# Altium PCB MaryLadder_8bits.PcbDoc (part 2 of 2)
Units mil, origin at the board's own origin, x right, y up, seen from the top; angles counter-clockwise.
Board outline 2465.9 x 2730.18 mil, 4 copper layers (Top Layer, Layer 1, Layer 2, Bottom Layer), stack 61.461 mil thick; 110 components, 105 nets, 478 pads, 183 vias.
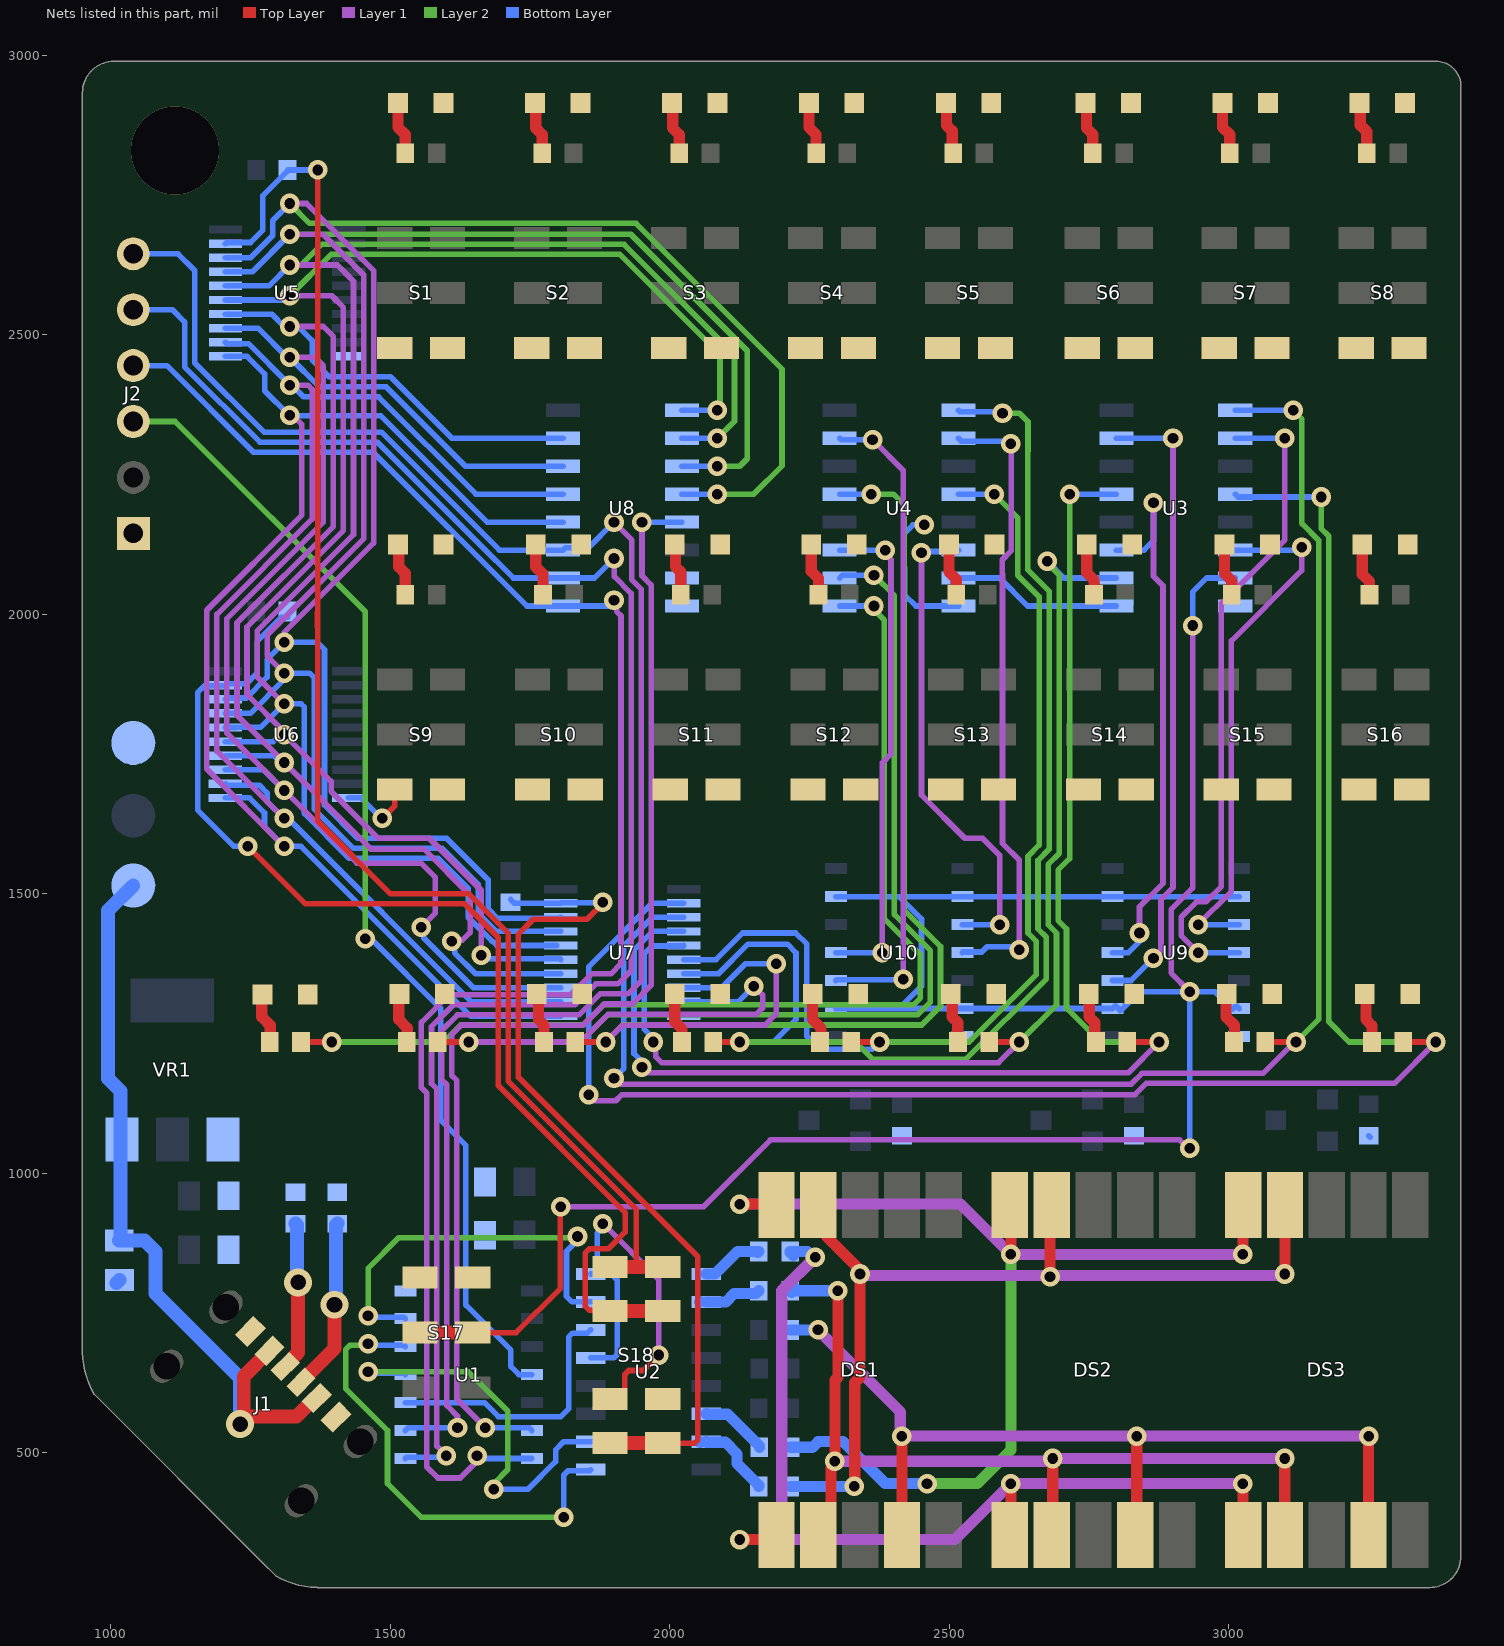
[diagram p4: the nets of this part, all layers, seen from the top]

## Via types
v1: diameter 35, hole 19, Top Layer to Bottom Layer, 179 vias
v2: diameter 50, hole 28, Top Layer to Bottom Layer, 3 vias
v3: diameter 157.48, hole 157.48, Top Layer to Bottom Layer, 1 vias

## Nets (pads, with @x,y where several pads share a name; then routed paths per layer and width w, separated by ;. In a path a pad name is that pad's centre, name@x,y a point inside that pad or via, vN(x,y) a via of type N, cw(c..) or ccw(c..) an arc to the next point about the centre after c; other vN are vias at no path point) (continued)
DS_C_R: DS1.4 DS2.4 DS3.4 R28.2 | length 1669.2
  Top Layer w20: v1(2415,530) 2415,353.25 DS1.4@2415.2,353.06 ; DS2.4@2832.5,353.06 2835,355.56 v1(2835,530) ; DS3.4@3249.8,353.06 3249.8,529.8 v1(3250,530)
  Layer 1 w20: v1(2265,720) 2412.13,572.87 2412.13,532.87 v1(2415,530) v1(2835,530) v1(3250,530)
  Bottom Layer w20: R28.2@2215,720 v1(2265,720)
DS_D: R29.1 U2.10 | length 103.5
  Bottom Layer w20: U2.10@2053.35,770 U2.10@2054.17,770.83 ; U2.10@2065,770 2100,770 2115,785 2154,785 R29.1@2159,790
DS_D_R: DS1.2 DS2.2 DS3.2 R29.2 | length 1641
  Top Layer w20: DS1.2@2265.59,353.06 2288.07,375.54 2288.07,474.01 2295.5,481.44 2295.5,630.3 2300.5,635.3 2300.5,789.5 v1(2300,790) ; DS2.2@2682.89,353.06 2685,355.16 v1(2685,490) ; DS2.2@2685.2,353.06 DS2.2@2692.5,360.36 ; v1(3100,490) 3100,353.25 DS3.2@3100.2,353.06
  Layer 1 w20: v1(2295,485) 2680,485 v1(2685,490) v1(3100,490)
  Bottom Layer w20: R29.2@2220.75,797.72 2215,791.97 R29.2@2215,790 2217.5,787.5 2220,790 v1(2300,790)
DS_E: R30.1 U2.9 | length 113
  Bottom Layer w20: U2.9@2065,820 2080.75,820 2120.75,860 R30.1@2159,860 R30.1@2157.25,858.25
DS_E_R: DS1.1 DS2.1 DS3.1 R30.2 | length 1830.2
  Top Layer w20: v1(2125,345) 2183.45,345 2188.45,350 2190.39,348.06 DS1.1@2212.72,370.38 ; DS2.1@2608.09,353.06 2610,354.96 v1(2610,445) ; DS2.1@2610.39,353.06 DS2.1@2621.41,364.07 ; v1(3025,445) 3025,353.45 DS3.1@3025.39,353.06
  Layer 1 w20: v1(2125,345) 2200,345 ; v1(2260,850) 2200,790 2200,345 ; v1(3025,445) v1(2610,445) 2510,345 2200,345
  Bottom Layer w20: R30.2@2220.75,852.87 2215,858.62 R30.2@2215,860 2245.94,860 2255.94,850 v1(2260,850)
DS_F: R31.1 U2.15 | length 139.6
  Bottom Layer w20: U2.15@2053.35,520 U2.15@2054.17,519.17 ; U2.15@2065,520 2065.83,519.17 2099.11,519.17 2120,498.28 2120,480.97 2159,441.97 R31.1@2159,440
DS_F_R: DS1.9 DS2.9 DS3.9 R31.2 | length 1671.2
  Top Layer w20: DS1.9@2265.59,943.61 2280,929.2 2280,887.01 2340,827.01 v1(2340,820) 2340,635 2330.5,625.5 2330.5,440.5 v1(2330,440) ; v1(2680,815) 2680,940.71 DS2.9@2682.89,943.61 ; v1(3100,820) 3100.2,820.2 DS3.9@3100.2,943.61
  Layer 1 w20: v1(2340,820) 2342.5,817.5 2677.5,817.5 v1(2680,815) 2682.5,817.5 3097.5,817.5 v1(3100,820)
  Bottom Layer w20: R31.2@2215,440 v1(2330,440)
DS_G: R32.1 U2.14 | length 121
  Bottom Layer w20: U2.14@2065,570 2065.83,569.17 2102.8,569.17 2160,511.97 R32.1@2160,510
DS_G_R: DS1.10 DS2.10 DS3.10 R32.2 | length 1993.4
  Top Layer w20: v1(2125,945) 2172.18,945 2182.18,935 DS1.10@2190.79,943.61 ; DS2.10@2608.09,943.61 2610,941.7 v1(2610,855) ; v1(3025,855) 3025,943.21 DS3.10@3025.39,943.61
  Layer 1 w20: v1(2125,945) 2520,945 v1(2610,855) v1(3025,855)
  Layer 2 w20: v1(2460,445) 2550,445 2610,505 v1(2610,855)
  Bottom Layer w20: R32.2@2216,510 2255,510 2265.5,520.5 2309.7,520.5 2385.2,445 v1(2460,445)
GND: C1.1 C2.1 C3.1 C4.1 C5.1 D1.2 D2.2 D3.2 D4.2 D5.2 D6.2 D7.2 D8.2 D9.2 D10.2 D11.2 D12.2 D13.2 D14.2 D15.2 D16.2 D17.2 D18.2 D19.2 D20.2 D21.2 D22.2 D23.2 D24.2 D25.2 GND.1 J1.A12 J1.B12 J2.1 R36.1 R37.1 R38.1 RCC1.2 RCC2.2 S1.3 S1.6 S2.3 S2.6 S3.3 S3.6 S4.3 S4.6 S5.3 S5.6 S6.3 S6.6 S7.3 S7.6 S8.3 S8.6 S9.3 S9.6 S10.3 S10.6 S11.3 S11.6 S12.3 S12.6 S13.3 S13.6 S14.3 S14.6 S15.3 S15.6 S16.3 S16.6 S17.1 S17.4 S18.3 S18.7 U1.14 U2.5 U2.8 U3.8 U4.8 U5.10 U6.10 U7.10 U8.7 U8.8 U9.7 U10.7 VR1.1 | length 1217.3
  Top Layer w10: v1(1485.5,1635) 1507.76,1657.26 S9.3@1507.76,1686.57 ; D9.2@1594.86,2125 D9.2@1595,2125.14 ; D1.2@1594.86,2915 D1.2@1595,2915.14 ; S10.3@1754.18,1686.57 S10.3@1754.81,1686.57 ; D2.2@1839.86,2915 D2.2@1840,2915.14 ; S18.3@1892.76,596.26 1904.57,596.26 1919.25,610.94 1919.25,640.29 1926.32,647.36 1952.36,647.36 v1(1980,675) ; S11.3@2000,1685.96 S11.3@2000.61,1686.57 ; D3.2@2084.86,2915 D3.2@2085,2915.14 ; D11.2@2089.95,2125 D11.2@2089.95,2125 ; S3.6@2092.24,2476.57 S3.6@2095,2473.82 ; D4.2@2329.86,2915 D4.2@2330,2915.14 ; D12.2@2334.15,2125 D12.2@2335,2125.85 ; D21.2@2336.83,1320.91 D21.2@2340.73,1317 ; S13.3@2493.47,1686.57 S13.3@2495,1685.04 ; D5.2@2574.86,2915 D5.2@2575,2915.14 ; D13.2@2580.58,2125 D13.2@2585,2129.42 ; D6.2@2824.86,2915 D6.2@2825,2915.14 ; D23.2@2825,1326.48 D23.2@2830.58,1320.91 D23.2@2843.29,1333.62 ; D14.2@2827,2125 D14.2@2830,2128 ; D7.2@3069.86,2915 D7.2@3070,2915.14 ; D15.2@3070,2128.43 D15.2@3073.43,2125 ; S8.3@3227.76,2476.57 S8.3@3229.81,2476.57 ; D16.2@3319.86,2125 D16.2@3320,2125.14 ; D25.2@3324.33,1320.91 D25.2@3327.24,1323.82
  Top Layer w25: J1.A12@1398.01,563.97 J1.A12@1402.61,563.97
  Layer 1 w10: v1(1880,910) 1980,810 v1(1980,675)
  Bottom Layer w10: U6.10@1425.04,1671.61 1447.48,1671.61 1484.09,1635 v1(1485.5,1635) ; U2.5@1858.31,670 1899.88,670 1905.74,675.86 1905.74,809.26 1895,820 U2.8@1864.17,820 ; U2.8@1858.31,820 U2.8@1864.17,820 ; v1(1880,910) 1880,903.24 1870,893.24 1870,825.83 U2.8@1864.17,820 ; v1(2455,2160) 2434.5,2160 2419.5,2145 2419.5,2084.07 2420,2083.57 2420,2035 2440,2015 U4.8@2516.3,2015 ; R38.1@3250,1067.44 R38.1@3252.44,1065
  Bottom Layer w25: C1.1@1010,804.13 C1.1@1015.39,809.53
  other v3: 1115,2830
IN_DS_A: U1.13 U2.7 | length 714.8
  Layer 2 w10: v1(1460,745) 1460,830 1515,885 1832.58,885 v1(1834.64,887.07)
  Bottom Layer w10: v1(1460,745) 1462.5,742.5 1524.31,742.5 U1.13@1526.81,740 ; v1(1834.64,887.07) 1834.64,880.3 1815,860.66 1815,780 1825,770 U2.7@1858.31,770
IN_DS_B: U1.12 U2.1 | length 851.4
  Layer 2 w10: v1(1460,695) 1457.5,692.5 1427.5,692.5 1420,685 1420,615 1494.75,540.25 1494.75,445.25 1555,385 v1(1810,385)
  Bottom Layer w10: v1(1460,695) 1462.5,692.5 1524.31,692.5 U1.12@1526.81,690 ; v1(1810,385) 1810,460 1817.98,467.98 1856.29,467.98 U2.1@1858.31,470
IN_DS_C: U1.11 U2.2 | length 719.1
  Layer 2 w10: v1(1460,645) 1640,645 1710,575 1710,470 1685,445 v1(1685,435)
  Bottom Layer w10: v1(1460,645) 1462.5,642.5 1524.31,642.5 U1.11@1526.81,640 ; v1(1685,435) 1746.1,435 1795.44,484.34 1795.44,505.44 1810,520 U2.2@1858.31,520
IN_DS_D: U1.10 U2.6 | length 481.2
  Bottom Layer w10: U1.10@1526.81,590 1668.13,590 1693.13,565 1805,565 1818.73,578.73 1818.73,707.05 1825.86,714.17 1852.48,714.17 U2.6@1858.31,720
K: S17.2 S17.5 U3.7 U9.2 U9.6 U9.9 U9.13 U10.2 U10.6 U10.9 U10.13 | length 4436.9
  Top Layer w10: S17.5@1647.24,715 1725,715 1804.14,794.14 1804.14,939.14 v1(1805,940)
  Top Layer w25: S17.2@1552.76,715 S17.5@1647.24,715
  Layer 1 w10: v1(1805,940) 1866.87,940 1867.37,940.5 2060.5,940.5 2180,1060 2911.64,1060 2926.64,1045 v1(2930,1045) ; v1(2930,1325) 2896.5,1358.5 2896.5,1471.96 2935,1510.46 v1(2935,1980)
  Bottom Layer w10: U10.9@2296.81,1295 2410,1295 ; U10.13@2296.81,1495 2410,1495 ; v1(2930,1045) v1(2930,1325) ; v1(2935,1980) 2935,2040 2960,2065 U3.7@3011.3,2065 ; U9.6@3018.19,1295 3013.19,1300 3006.59,1293.41 2975,1325 v1(2930,1325) ; U9.2@3018.19,1495 U9.13@2791.81,1495 2791.31,1494.5 2523.69,1494.5 U10.2@2523.19,1495 2410,1495 ; 2410,1295 2450,1335 2450,1455 2410,1495 ; 2410,1295 U10.6@2523.19,1295 U9.9@2791.81,1295 2796.81,1300 2805.91,1290.91 2840,1325 v1(2930,1325)
M0: U5.18 U6.18 U7.18 U8.4 | length 3537.7
  Layer 1 w10: v1(1310,1950) 1310,1967.68 1470,2127.68 1470,2615 1350,2735 v1(1320,2735)
  Layer 2 w10: v1(1320,2735) 1355.5,2699.5 1939.64,2699.5 2200.5,2438.64 2200.5,2265.5 2150,2215 v1(2085,2215)
  Bottom Layer w10: U6.18@1204.96,1847.99 1207.44,1850.47 1242.34,1850.47 1279.5,1887.63 1279.5,1919.5 v1(1310,1950) 1369.14,1950 1382.12,1937.02 1382.12,1658.75 1441.37,1599.5 1600.5,1599.5 1675,1525 1675,1473.15 1691.9,1456.25 1803.22,1456.25 U7.18@1804.96,1457.99 ; U5.18@1205,2637.99 1249.47,2637.99 1289.5,2678.02 1289.5,2704.5 v1(1320,2735) ; U8.4@2021.3,2215 v1(2085,2215)
M1: U5.17 U6.17 U7.17 U8.3 | length 3318
  Layer 1 w10: v1(1310,1895) 1279.5,1925.5 1279.5,1962.63 1452,2135.13 1452,2607.54 1379.54,2680 v1(1320,2680)
  Layer 2 w10: v1(1320,2680) 1930,2680 2138.43,2471.57 2138.43,2278.43 2125,2265 v1(2085,2265)
  Bottom Layer w10: U6.17@1204.96,1822.8 1249.43,1822.8 1310,1883.36 v1(1310,1895) 1355,1895 1364.12,1885.88 1364.12,1651.29 1433.91,1581.5 1593.04,1581.5 1657,1517.54 1657,1465.69 1689.9,1432.8 U7.17@1804.96,1432.8 ; U5.17@1205,2612.8 1252.8,2612.8 v1(1320,2680) ; U8.3@2021.3,2265 v1(2085,2265)
M2: U5.16 U6.16 U7.16 U8.2 | length 3153.7
  Layer 1 w10: v1(1310,1840) 1261.5,1888.5 1261.5,1970.09 1434,2142.59 1434,2596 1405,2625 v1(1320,2625)
  Layer 2 w10: v1(1320,2625) 1340,2625 1377,2662 1918,2662 2115.5,2464.5 2115.5,2345.5 v1(2085,2315)
  Bottom Layer w10: U6.16@1204.96,1797.6 1222.14,1797.6 1222.76,1798.22 1268.22,1798.22 v1(1310,1840) 1340.26,1840 1346.12,1834.14 1346.12,1643.84 1426.46,1563.5 1585.59,1563.5 1639,1510.09 1639,1458.24 1681.74,1415.5 1682.63,1415.5 1690.54,1407.6 U7.16@1797.6,1407.6 ; U5.16@1205,2587.6 1282.6,2587.6 v1(1320,2625) ; U8.2@2021.3,2315 v1(2085,2315)
M3: U5.15 U6.15 U7.15 U8.1 | length 2983.1
  Layer 1 w10: v1(1320,2570) 1395,2570 1416,2549 1416,2150.05 1243.5,1977.55 1243.5,1856.5 1310,1790 v1(1310,1785) 1393.83,1701.17 1393.83,1683.54 1477.87,1599.5 1569.5,1599.5 1662.5,1506.5 v1(1662.5,1390)
  Layer 2 w10: v1(1320,2570) 1394,2644 1910.54,2644 2089.54,2465 2089.54,2369.54 v1(2085,2365)
  Bottom Layer w10: U6.15@1204.96,1772.4 1290.64,1772.4 1303.24,1785 v1(1310,1785) v1@1305.22,1780.22 ; U5.15@1205,2562.4 1305.64,2562.4 1313.24,2570 v1(1320,2570) ; v1(1662.5,1390) 1668.8,1383.7 1803.66,1383.7 U7.15@1804.96,1382.4 ; U8.1@2021.3,2365 v1(2085,2365)
M4: U5.14 U6.14 U7.14 U8.15 | length 2544.9
  Layer 1 w10: v1(1320,2515) 1380,2515 1398,2497 1398,2157.5 1225.5,1985 1225.5,1819.5 1465,1580 1560,1580 1642.5,1497.5 1642.5,1430.86 1628.32,1416.68 1611.68,1416.68 v1(1610,1415)
  Bottom Layer w10: U6.14@1204.96,1747.2 1291.03,1747.2 1303.24,1735 v1(1310,1735) ; U5.14@1205,2537.2 1287.8,2537.2 1310,2515 v1(1320,2515) 1335,2515 1360,2490 1360,2455 1390,2425 1500,2425 1610,2315 U8.15@1808.7,2315 ; v1(1610,1415) 1614.78,1410.22 1614.78,1394.58 1652.16,1357.2 U7.14@1804.96,1357.2
M5: U5.13 U6.13 U7.13 U8.14 | length 2504.3
  Layer 1 w10: v1(1320,2460) 1365,2460 1380,2445 1380,2164.96 1207.5,1992.46 1207.5,1787.5 1440,1555 1555,1555 1580,1530 1580,1465 v1(1555,1440)
  Bottom Layer w10: U6.13@1204.96,1722.01 1272.99,1722.01 v1(1310,1685) ; U5.13@1205,2512.01 1262.99,2512.01 1315,2460 v1(1320,2460) 1373,2407 1492.54,2407 1634.54,2265 U8.14@1808.7,2265 ; v1(1555,1440) 1559.78,1435.22 1559.78,1420.65 1648.42,1332.01 U7.13@1804.96,1332.01
M6: U5.12 U6.12 U7.12 U8.13 | length 2418
  Layer 1 w10: v1(1310,1635) 1189.5,1755.5 1189.5,1999.91 1360,2170.41 1360,2402.5 1352.5,2410 v1(1320,2410)
  Bottom Layer w10: U6.12@1204.96,1696.81 1207.44,1694.33 1265.67,1694.33 1279.5,1680.5 1279.5,1665.5 1313.23,1631.77 1320,1631.77 1326.31,1625.45 1326.41,1625.45 1645.06,1306.81 U7.12@1804.96,1306.81 ; U5.12@1205,2486.81 1207.48,2484.33 1246.13,2484.33 1320,2410.46 v1(1320,2410) 1323.96,2410 1344.96,2389 1479,2389 1653,2215 U8.13@1808.7,2215
M7: U5.11 U6.11 U7.11 U8.12 | length 2430.9
  Layer 1 w10: v1(1310,1585) 1171.5,1723.5 1171.5,2007.37 1341.76,2177.63 1341.76,2340 1325.26,2356.5 v1(1320,2356.5)
  Bottom Layer w10: U6.11@1204.96,1671.61 1247.93,1671.61 1274.77,1644.77 1274.77,1620.23 v1(1310,1585) 1340,1585 1643.39,1281.61 U7.11@1804.96,1281.61 ; U5.11@1205,2461.61 1205.11,2461.5 1243.5,2461.5 1275,2430 1275,2400 1318.5,2356.5 v1(1320,2356.5) ; v1@1320,2355 1483,2355 1673,2165 U8.12@1808.7,2165
M_A: J2.6 U1.9 U8.11 | length 3248.7
  Layer 1 w10: v1(1620,545) 1620,565.46 1601,584.46 1601,1158.54 1591.5,1168.04 1591.5,1255.09 1619.91,1283.5 1837.59,1283.5 1875.09,1321 1925,1321 1948.5,1344.5 1948.5,2045.09 1932,2061.59 1932,2133 v1(1900,2165)
  Bottom Layer w10: J2.6@1040,2645 1120,2645 1150,2615 1150,2450 1274,2326 1484,2326 1695,2115 U8.11@1808.7,2115 1812.91,2119.21 1854.21,2119.21 v1(1900,2165) ; U1.9@1526.81,540 1531.81,545 v1(1620,545)
M_B: J2.5 U1.8 U8.10 | length 3122.8
  Layer 1 w10: v1(1600,495) 1583,512 1583,1151.09 1573.5,1160.59 1573.5,1262.55 1612.45,1301.5 1830,1301.5 1867.5,1339 1907,1339 1930.5,1362.5 1930.5,2037.63 1900.63,2067.5 1900.63,2099.37 v1(1900,2100)
  Bottom Layer w10: J2.5@1040,2545 1110,2545 1132,2523 1132,2442.54 1266.54,2308 1476.54,2308 1687.54,2097 1688,2097 1720,2065 U8.10@1808.7,2065 1865,2065 v1(1900,2100) ; U1.8@1526.81,490 1529.31,492.5 1597.5,492.5 v1(1600,495)
M_C: J2.4 U1.7 U8.9 | length 3117.7
  Layer 1 w10: v1(1655,495) 1655,485 1625,455 1585,455 1565,475 1565,1143.63 1555.5,1153.13 1555.5,1270 1605,1319.5 1822.54,1319.5 1860.04,1357 1894.27,1357 1912.5,1375.23 1912.5,1997.5 1904.78,2005.22 1904.78,2020.22 v1(1900,2025)
  Bottom Layer w10: J2.4@1040,2445 1100,2445 1255,2290 1469.09,2290 1744.09,2015 U8.9@1808.7,2015 1890,2015 v1(1900,2025) ; v1(1655,495) 1660,490 U1.7@1753.19,490
M_Y: U1.6 U8.5 | length 2113.8
  Layer 1 w10: v1(1670,545) 1619,596 1619,1166 1609.5,1175.5 1609.5,1247.63 1627.37,1265.5 1652.63,1265.5 1653.13,1265 1844.54,1265 1882.54,1303 1933,1303 1966.5,1336.5 1966.5,2052.55 1950,2069.05 v1(1950,2165)
  Bottom Layer w10: v1(1670,545) 1748.19,545 U1.6@1753.19,540 ; v1(1950,2165) U8.5@2021.3,2165
NetD1_1: D1.1 R1.2 | length 95.3
  Top Layer w20: D1.1@1513.66,2915 1513.66,2871.34 1526.56,2858.44 R1.2@1526.56,2825
NetD2_1: D2.1 R2.2 | length 95.3
  Top Layer w20: D2.1@1758.66,2915 1760,2913.66 1760,2870 1771.56,2858.44 R2.2@1771.56,2825
NetD3_1: D3.1 R3.2 | length 95.3
  Top Layer w20: D3.1@2003.66,2915 2005,2913.66 2005,2870 2016.56,2858.44 R3.2@2016.56,2825
NetD4_1: D4.1 R4.2 | length 95.3
  Top Layer w20: D4.1@2248.66,2915 2248.66,2871.34 2261.56,2858.44 R4.2@2261.56,2825
NetD5_1: D5.1 R5.2 | length 95.3
  Top Layer w20: D5.1@2493.66,2915 2495,2913.66 2495,2875 2505,2865 2505,2826.56 R5.2@2506.56,2825
NetD6_1: D6.1 R6.2 | length 95.3
  Top Layer w20: D6.1@2743.66,2915 2745,2913.66 2745,2870 2756.56,2858.44 R6.2@2756.56,2825
NetD7_1: D7.1 R7.2 | length 95.3
  Top Layer w20: D7.1@2988.66,2915 2988.66,2871.34 3001.56,2858.44 R7.2@3001.56,2825
NetD8_1: D8.1 R8.2 | length 95.3
  Top Layer w20: D8.1@3233.66,2915 3235,2913.66 3235,2875 3246.56,2863.44 R8.2@3246.56,2825
NetD9_1: D9.1 R9.2 | length 95.3
  Top Layer w20: D9.1@1513.66,2125 1515,2123.66 1515,2085 1526.56,2073.44 R9.2@1526.56,2035
NetD10_1: D10.1 R10.2 | length 95.4
  Top Layer w20: D10.1@1760.09,2125 1760,2124.91 1760,2085 1772.99,2072.01 R10.2@1772.99,2035
NetD11_1: D11.1 R11.2 | length 94.4
  Top Layer w20: D11.1@2008.75,2125 2010,2123.75 2010,2085 2019.42,2075.58 R11.2@2019.42,2035
NetD12_1: D12.1 R12.2 | length 95.3
  Top Layer w20: D12.1@2252.95,2125 2252.95,2077.05 2265.84,2064.16 R12.2@2265.84,2035
NetD13_1: D13.1 R13.2 | length 95.3
  Top Layer w20: D13.1@2499.38,2125 2499.38,2075.62 2512.27,2062.73 R13.2@2512.27,2035
NetD14_1: D14.1 R14.2 | length 95.3
  Top Layer w20: D14.1@2745.8,2125 2745.8,2074.2 2758.7,2061.3 R14.2@2758.7,2035
NetD15_1: D15.1 R15.2 | length 95.3
  Top Layer w20: D15.1@2992.23,2125 2992.23,2072.77 3005.13,2059.87 R15.2@3005.13,2035
NetD16_1: D16.1 R16.2 | length 95.3
  Top Layer w20: D16.1@3238.66,2125 3238.66,2071.34 3251.56,2058.44 R16.2@3251.56,2035
NetD17_1: D17.1 R17.2 | length 92.7
  Top Layer w20: D17.1@1271.1,1320 1270,1318.9 1270,1280 1285,1265 1285,1236 R17.2@1284,1235 ; D17.1@1273.13,1319.55 D17.1@1273.58,1320
NetD18_1: D18.1 R18.2 | length 93
  Top Layer w20: D18.1@1516.1,1320.91 1515,1319.8 1515,1275 1530,1260 1530,1236 R18.2@1529,1235
NetD19_1: D19.1 R19.2 | length 92.1
  Top Layer w20: D19.1@1761.42,1320.45 D19.1@1761.88,1320.91 1765,1317.78 1765,1275 1775,1265 1775,1235.23 R19.2@1774.77,1235
NetD20_1: D20.1 R20.2 | length 91.9
  Top Layer w20: D20.1@2008.3,1320.45 D20.1@2008.75,1320.91 2008.75,1271.25 2021.65,1258.35 R20.2@2021.65,1235
NetD21_1: D21.1 R21.2 | length 93
  Top Layer w20: D21.1@2255.62,1320.91 2255,1320.28 2255,1275 2270,1260 2270,1236.48 R21.2@2268.52,1235
NetD22_1: D22.1 R22.2 | length 91.9
  Top Layer w20: D22.1@2502.05,1320.45 D22.1@2502.5,1320.91 2505,1318.41 2505,1280 2515,1270 2515,1235.4 R22.2@2515.4,1235
NetD23_1: D23.1 R23.2 | length 92.5
  Top Layer w20: D23.1@2748.47,1320 D23.1@2749.38,1320.91 2750,1320.28 2750,1280 2760,1270 2760,1237.27 R23.2@2762.27,1235
NetD24_1: D24.1 R24.2 | length 93
  Top Layer w20: D24.1@2996.25,1320.91 2995,1319.66 2995,1280 3010,1265 3010,1235.85 R24.2@3009.15,1235
NetD25_1: D25.1 R25.2 | length 99.6
  Top Layer w20: D25.1@3237.22,1315 D25.1@3243.12,1320.91 3245,1319.03 3245,1275 3256.02,1263.98 R25.2@3256.02,1235
NetJ1_A5: J1.A5 RCC2.1 | length 267.1
  Top Layer w25: J1.A5@1312.13,654.44 1312.13,656.25 1335,679.12 v2(1335,805)
  Bottom Layer w25: RCC2.1@1330,910 1332.5,907.5 1332.5,807.5 v2(1335,805)
NetJ1_B5: J1.B5 RCC1.1 | length 310.3
  Top Layer w25: J1.B5@1339.97,626.6 1400,686.63 v2(1400,765)
  Bottom Layer w25: v2(1400,765) 1402.5,767.5 1402.5,907.5 RCC1.1@1405,910
NetU3_9: U3.9 U4.7 | length 303.1
  Bottom Layer w10: U4.7@2516.3,2065 2590,2065 2640,2015 U3.9@2798.7,2015
OE_A: R33.2 S18.1 S18.5 U5.19 | length 2632.4
  Top Layer w10: v1(1370,2795) 1370,2003.13 1369.5,2002.63 1369.5,1977.37 1370,1976.87 1370,1630.46 1500.46,1500 1640.46,1500 1711,1429.46 1711,1164.46 1940,935.46 1940,832.48
  Top Layer w25: S18.1@1892.76,832.48 1940,832.48 S18.5@1987.24,832.48
  Bottom Layer w10: U5.19@1205,2663.19 1207.06,2665.24 1249.92,2665.24 1271.5,2686.82 1271.5,2748.53 1316,2793.03 R33.2@1316,2795 v1(1370,2795)
OE_B: R34.2 S18.2 S18.6 U6.19 | length 2038.3
  Top Layer w10: v1(1245,1585) 1348,1482 1633,1482 1693,1422 1693,1157 1920,930 1920,895 1890.17,865.17 1855.88,865.17 1848.26,857.55 1848.26,762.6 1855.86,755 1891.5,755 S18.2@1892.76,753.74
  Top Layer w25: S18.2@1892.76,753.74 S18.6@1987.24,753.74
  Bottom Layer w10: v1(1245,1585) 1244.52,1585.48 1219.52,1585.48 1155,1650 1155,1860 1167.27,1872.27 1204.04,1872.27 1207.44,1875.67 1242.08,1875.67 1261.5,1895.09 1261.5,1951.5 1305,1995 R34.2@1316,1995
OE_S: R35.2 S18.4 S18.8 U7.19 | length 1541.7
  Top Layer w10: v1(1880,1485) 1880,1483 1851.68,1454.68 1755.54,1454.68 1729,1428.14 1729,1171.91 2050,850.91 2050,523.38 2044.14,517.52 S18.8@1987.24,517.52
  Top Layer w25: S18.4@1892.76,517.52 S18.8@1987.24,517.52
  Bottom Layer w10: R35.2@1715,1490 1721.81,1483.19 U7.19@1804.96,1483.19 1805.87,1484.09 1879.09,1484.09 v1(1880,1485)
RESET: J2.3 U1.4 | length 2063.8
  Layer 2 w10: J2.3@1040,2345 1115,2345 1455,2005 v1(1455,1420)
  Bottom Layer w10: v1(1455,1420) 1459.78,1415.22 1469.78,1415.22 1589.77,1295.23 1589.77,1095.23 1635,1050 1635,764.54 1715.5,684.04 1715.5,654.5 1730,640 U1.4@1753.19,640
S0: R25.1 U3.4 U7.2 | length 3374.4
  Top Layer w10: R25.1@3312.02,1235 v1(3370,1235)
  Layer 1 w10: v1(1854.5,1140.5) 1865,1130 1903.13,1130 1913.63,1140.5 2831.41,1140.5 2851.91,1161 3296,1161 v1(3370,1235)
  Layer 2 w10: v1(3165,2210) 3165,2153.59 3178.5,2140.09 3178.5,1271.5 3215,1235 v1(3370,1235)
  Bottom Layer w10: v1(1854.5,1140.5) 1854.5,1369.5 1968.19,1483.19 U7.2@2025.04,1483.19 ; U3.4@3011.3,2215 3016.3,2210 v1(3165,2210)
S1: R24.1 U3.1 U7.3 | length 2952.7
  Top Layer w10: R24.1@3065.15,1235 v1(3120,1235)
  Layer 1 w10: v1(1900,1170) 1910.5,1159.5 2824.96,1159.5 2844.46,1179 3061.17,1179 3117.17,1235 v1(3120,1235)
  Layer 2 w10: v1(3115,2365) 3130.5,2349.5 3130.5,2162.63 3160.5,2132.63 3160.5,1275.5 v1(3120,1235)
  Bottom Layer w10: v1(1900,1170) 1917.73,1187.73 1917.73,1407.27 1968.45,1457.99 U7.3@2025.04,1457.99 ; U3.1@3011.3,2365 v1(3115,2365)
S2: R23.1 U3.13 U7.4 | length 2535.8
  Top Layer w10: R23.1@2818.27,1235 v1(2875,1235)
  Layer 1 w10: v1(1950,1190) 1960,1180 2820,1180 v1(2875,1235)
  Layer 2 w10: v1(2715,2215) 2715,1563.13 2694.5,1542.63 2694.5,1452.37 2709.5,1437.37 2709.5,1295.5 2770,1235 v1(2875,1235)
  Bottom Layer w10: v1(1950,1190) 1950,1200 1935.73,1214.27 1935.73,1399.82 1968.71,1432.8 U7.4@2025.04,1432.8 ; v1(2715,2215) U3.13@2798.7,2215
S3: R22.1 U3.10 U7.5 | length 2040.9
  Top Layer w10: R22.1@2571.4,1235 v1(2625,1235)
  Layer 1 w10: v1(1970,1235) 1974.78,1230.22 1974.78,1208.35 1985.13,1198 2588,1198 v1(2625,1235)
  Layer 2 w10: v1(2625,1235) 2691.5,1301.5 2691.5,1429.91 2676.5,1444.91 2676.5,1552.45 2696.5,1572.45 2696.5,2070.54 2675,2092.04 v1(2675,2095)
  Bottom Layer w10: v1(1970,1235) 1970,1241.76 1953.73,1258.04 1953.73,1392.36 1968.18,1406.82 2024.26,1406.82 U7.5@2025.04,1407.6 ; v1(2675,2095) 2705,2065 U3.10@2798.7,2065
S4: R21.1 U4.4 U7.6 | length 1911.4
  Top Layer w10: R21.1@2324.52,1233.03 R21.1@2324.52,1235 v1(2375,1235)
  Layer 2 w10: v1(2375,1235) 2535,1235 2655.5,1355.5 2655.5,1415 2640.5,1430 2640.5,1567.37 2660.5,1587.37 2660.5,2031.5 2622,2070 2622,2173 v1(2580,2215)
  Bottom Layer w10: U7.6@2025.04,1382.4 2082.4,1382.4 2130,1430 2225,1430 2245,1410 2245,1245.4 2268.24,1222.16 2362.16,1222.16 v1(2375,1235) ; U4.4@2516.3,2215 v1(2580,2215)
S5: R20.1 U4.1 U7.7 | length 2292.8
  Top Layer w10: R20.1@2077.65,1235 v1(2125,1235)
  Layer 2 w10: v1(2125,1235) 2331.87,1235 2362.37,1204.5 2529.96,1204.5 2673.5,1348.04 2673.5,1422.45 2658.5,1437.45 2658.5,1559.91 2678.5,1579.91 2678.5,2041.5 2640,2080 2640,2291.87 2640.5,2292.37 2640.5,2344.5 2625,2360 v1(2595,2360)
  Bottom Layer w10: U7.7@2025.04,1357.2 2087.2,1357.2 2140,1410 2210,1410 2225.5,1394.5 2225.5,1275.5 2185,1235 v1(2125,1235) ; U4.1@2516.3,2365 2518.8,2362.5 2592.5,2362.5 v1(2595,2360)
S6: R19.1 U4.13 U7.8 | length 2325.3
  Top Layer w10: R19.1@1830.77,1235 v1(1885,1235)
  Layer 1 w10: v1(1885,1235) 1915,1265 1956.87,1265 1957.37,1265.5 2170.5,1265.5 2190,1285 v1(2190,1375)
  Layer 2 w10: v1(1885,1235) 1915.5,1265.5 2450.5,1265.5 2484,1299 2484,1406 2419.5,1470.5 2419.5,2195.5 2400,2215 v1(2360,2215)
  Bottom Layer w10: U7.8@2025.04,1332.01 2092.01,1332.01 2135,1375 v1(2190,1375) ; U4.13@2303.7,2215 v1(2360,2215)
S7: R18.1 U4.10 U7.9 | length 2512.8
  Top Layer w10: R18.1@1585,1235 v1(1640,1235)
  Layer 1 w10: v1(1640,1235) 1840,1235 1890,1285 2155,1285 2165.86,1295.86 2165.86,1319.14 v1(2150,1335)
  Layer 2 w10: v1(1640,1235) 1840,1235 1888.5,1283.5 2443.04,1283.5 2466,1306.46 2466,1398.54 2401.5,1463.04 2401.5,2033.5 v1(2365,2070)
  Bottom Layer w10: U7.9@2025.04,1306.81 2121.81,1306.81 v1(2150,1335) ; U4.10@2303.7,2065 2308.7,2070 v1(2365,2070)
S8: R17.1 U4.9 | length 1937.7
  Top Layer w10: R17.1@1340,1235 v1(1395,1235)
  Layer 2 w10: v1(1395,1235) 1595,1235 1625.5,1265.5 1845.04,1265.5 1881.04,1301.5 2435.5,1301.5 2448,1314 2448,1391.09 2384.09,1455 2383.5,1455 2383.5,1989.74 2365,2008.24 v1(2365,2015)
  Bottom Layer w10: U4.9@2303.7,2015 v1(2365,2015)
VCC: C1.2 J1.A9 J1.B9 VCC.1 VR1.3 | length 1417.6
  Top Layer w25: v2@1225,545 v2(1231.33,551.33) 1237.66,557.66 v2@1237.66,565 ; J1.B9@1283.74,680.5 J1.B9@1283.74,682.84 1237.66,636.76 v2@1237.66,565 ; J1.A9@1368.37,598.21 1364.89,598.21 1331.68,565 v2@1237.66,565
  Bottom Layer w25: VCC.1@1040,1515 995,1470 995,1170 1017.22,1147.78 1017.22,882.78 1014.72,880.28 C1.2@1015,880 1060,880 1080,860 1080,785 1231.33,633.67 v2(1231.33,551.33)
XB0: U3.6 U9.3 | length 945.6
  Layer 1 w10: v1(2945,1445) 3004.5,1504.5 3004.5,1952.63 3130,2078.13 v1(3130,2120)
  Bottom Layer w10: v1(2945,1445) U9.3@3018.19,1445 ; U3.6@3011.3,2115 3125,2115 v1(3130,2120)
XB1: U3.2 U9.4 | length 1181.1
  Layer 1 w10: v1(2945,1395) 2914.5,1425.5 2914.5,1458.21 2941.86,1485.57 2958.57,1485.57 2986.5,1513.5 2986.5,2019.63 3100,2133.13 v1(3100,2315)
  Bottom Layer w10: v1(2945,1395) U9.4@3018.19,1395 ; U3.2@3011.3,2315 v1(3100,2315)
XB2: U3.15 U9.10 | length 1135.6
  Layer 1 w10: v1(2865,1385) 2878.5,1398.5 2878.5,1489.96 2900,1511.46 v1(2900,2315)
  Bottom Layer w10: U9.10@2791.81,1345 2825,1345 v1(2865,1385) ; U3.15@2798.7,2315 v1(2900,2315)
XB3: U3.11 U9.11 | length 1007.3
  Layer 1 w10: v1(2840,1430) 2840,1476.91 2882,1518.91 2882,2051.24 2865,2068.24 v1(2865,2200)
  Bottom Layer w10: U9.11@2791.81,1395 2820,1395 2840,1415 v1(2840,1430) ; U3.11@2798.7,2115 2848.09,2115 2865,2131.91 v1(2865,2200)
XB4: U4.6 U10.3 | length 877
  Layer 1 w10: v1(2450,2110) 2450,1676.87 2527.37,1599.5 2559.5,1599.5 2590,1569 v1(2590,1445)
  Bottom Layer w10: v1(2450,2110) 2452.5,2112.5 2513.8,2112.5 U4.6@2516.3,2115 ; U10.3@2523.19,1445 v1(2590,1445)
XB5: U4.2 U10.4 | length 1130.7
  Layer 1 w10: v1(2610,2305) 2610.5,2304.5 2610.5,2113.63 2594.5,2097.63 2594.5,2072.37 2595,2071.87 2595,1590.46 2625,1560.46 v1(2625,1400)
  Bottom Layer w10: U4.2@2516.3,2315 2521.52,2309.78 2605.22,2309.78 v1(2610,2305) ; U10.4@2523.19,1395 2524.2,1396.01 2557.87,1396.01 2567.37,1405.5 2612.74,1405.5 2618.24,1400 v1(2625,1400)
XB6: U4.15 U10.10 | length 1169.3
  Layer 1 w10: v1(2362.5,2312.5) 2417.5,2257.5 v1(2417.5,1347.5)
  Bottom Layer w10: U10.10@2296.81,1345 2298.06,1346.25 2416.25,1346.25 v1(2417.5,1347.5) ; U4.15@2303.7,2315 2306.2,2312.5 v1(2362.5,2312.5)
XB7: U4.11 U10.11 | length 895.3
  Layer 1 w10: v1(2380,1395) 2380,1734.45 2395.5,1749.95 2395.5,2097.74 2385,2108.24 v1(2385,2115)
  Bottom Layer w10: U10.11@2296.81,1395 v1(2380,1395) ; U4.11@2303.7,2115 v1(2385,2115)
pads on no net: DS1.5 DS2.5 DS3.5 J1.1 J1.2 J1.3 J1.4 U5.1 U6.1 U7.1 U8.6

## Polygon pours and split planes (outlines as drawn)
GND on Bottom Layer "Bottom Layer-No Net" (solid, pour order 8): 3420,2995 945,2995 945,625 1315,255 3420,255
GND on Top Layer "Top Layer-No Net" (solid, pour order 6): 3420,2995 945,2995 945,625 1315,255 3420,255

## Silkscreen, mask and mechanical layers (free items; w line width, h text height)
Top Overlay:
  circle w15: c1325,2585 r90
  circle w10: c1770,545 r40
  circle w10: c1770,675 r40
  circle w10: c1770,805 r40
  circle w10: c1440,615 r40
  circle w10: c1440,810 r40
  circle w15: c1100.41,1280 r90
  circle w15: c1325,1790 r90
  region: 1072.45,572.47 1257.44,387.46 1384.99,514.99 1200,700
  region: 1130,2162.5 1130,2117.5 1105,2142.5
  lines w10: 1370,715 1500,715 ; 1435,1140 1435,1390 ; 1725,610 1815,610 ; 1725,740 1815,740
  text "A" at 1250,2545 h150
  text "A7" at 1489.29,2305 h100
  text "A6" at 1734.29,2305 h100
  text "A5" at 1979.29,2305 h100
  text "A4" at 2219.29,2305 h100
  text "A3" at 2464.29,2305 h100
  text "A2" at 2709.29,2305 h100
  text "A1" at 2959.29,2305 h100
  text "A0" at 3204.29,2305 h100
  text "128" at 1515,2255 h50
  text "64" at 1758.51,2255 h50
  text "32" at 2003.51,2255 h50
  text "16" at 2243.51,2255 h50
  text "8" at 2488.51,2255 h50
  text "4" at 2733.51,2255 h50
  text "2" at 2983.51,2255 h50
  text "1" at 3228.51,2255 h50
  text "B" at 1260,1745 h150
  text "B7" at 1489.29,1515 h100
  text "B6" at 1734.29,1515 h100
  text "B5" at 1979.29,1515 h100
  text "B4" at 2225,1515 h100
  text "B3" at 2470,1515 h100
  text "B2" at 2715,1515 h100
  text "B1" at 2959.29,1515 h100
  text "B0" at 3204.29,1515 h100
  text "128" at 1510,1465 h50
  text "64" at 1758.51,1465 h50
  text "32" at 2003.51,1465 h50
  text "16" at 2250,1465 h50
  text "8" at 2495,1465 h50
  text "4" at 2740,1465 h50
  text "2" at 2990,1465 h50
  text "1" at 3228.51,1465 h50
  text "S" at 1035.41,1235 h150
  text "S6" at 1735,1115 h100
  text "S5" at 1980,1115 h100
  text "S4" at 2229.29,1115 h100
  text "S3" at 2474.29,1115 h100
  text "S2" at 2719.29,1115 h100
  text "S1" at 2969.29,1115 h100
  text "S0" at 3214.29,1115 h100
  text "S8" at 1245,1110 h100
  text "S7" at 1490,1110 h100
  text "16" at 2248.51,1065 h50
  text "8" at 2493.51,1065 h50
  text "4" at 2738.51,1065 h50
  text "2" at 2988.51,1065 h50
  text "1" at 3233.51,1065 h50
  text "256" at 1275,1060 h50
  text "128" at 1515,1060 h50
  text "64" at 1760,1060 h50
  text "32" at 2010,1060 h50
  text "A" at 1745,785 h65
  text "+" at 1420,780 h60
  text "B" at 1750,655 h65
  text "-" at 1420,585 h60
  text "S" at 1750,525 h65
Bottom Overlay:
  region: 1105,2162.5 1105,2117.5 1080,2142.5
Mechanical 1:
  lines w10: 1294.62,280.41 1269.99,305.04 1269.96,305.04 ; 1294.63,280.4 ccw(c1370.48,406.99) 1368.82,259.43 1369.15,259.1 3359.1,259.1 ccw(c3359.1,315) 3415,315 3415,2945 ccw(c3370.73,2945) 3370.73,2989.27 1005,2989.27 ccw(c1005,2933.37) 949.1,2933.37 949.1,680 ccw(c1099.03,681.69) 970.41,604.62 1269.96,305.07 ; 1269.96,305.04 1269.96,305.07